# Altium PCB radxa_cm3_io_board_v1360_pcb_layout.PcbDoc (part 5 of 7)
Units mil, origin at the board's own origin, x right, y up, seen from the top; angles counter-clockwise.
Board outline 6299.61 x 3544.09 mil, 4 copper layers (Top, GND, Power, Bottom), stack 35.4 mil thick; 513 components, 397 nets, 1855 pads, 2695 vias.
Unrouted connection lines stored in the file: 280.
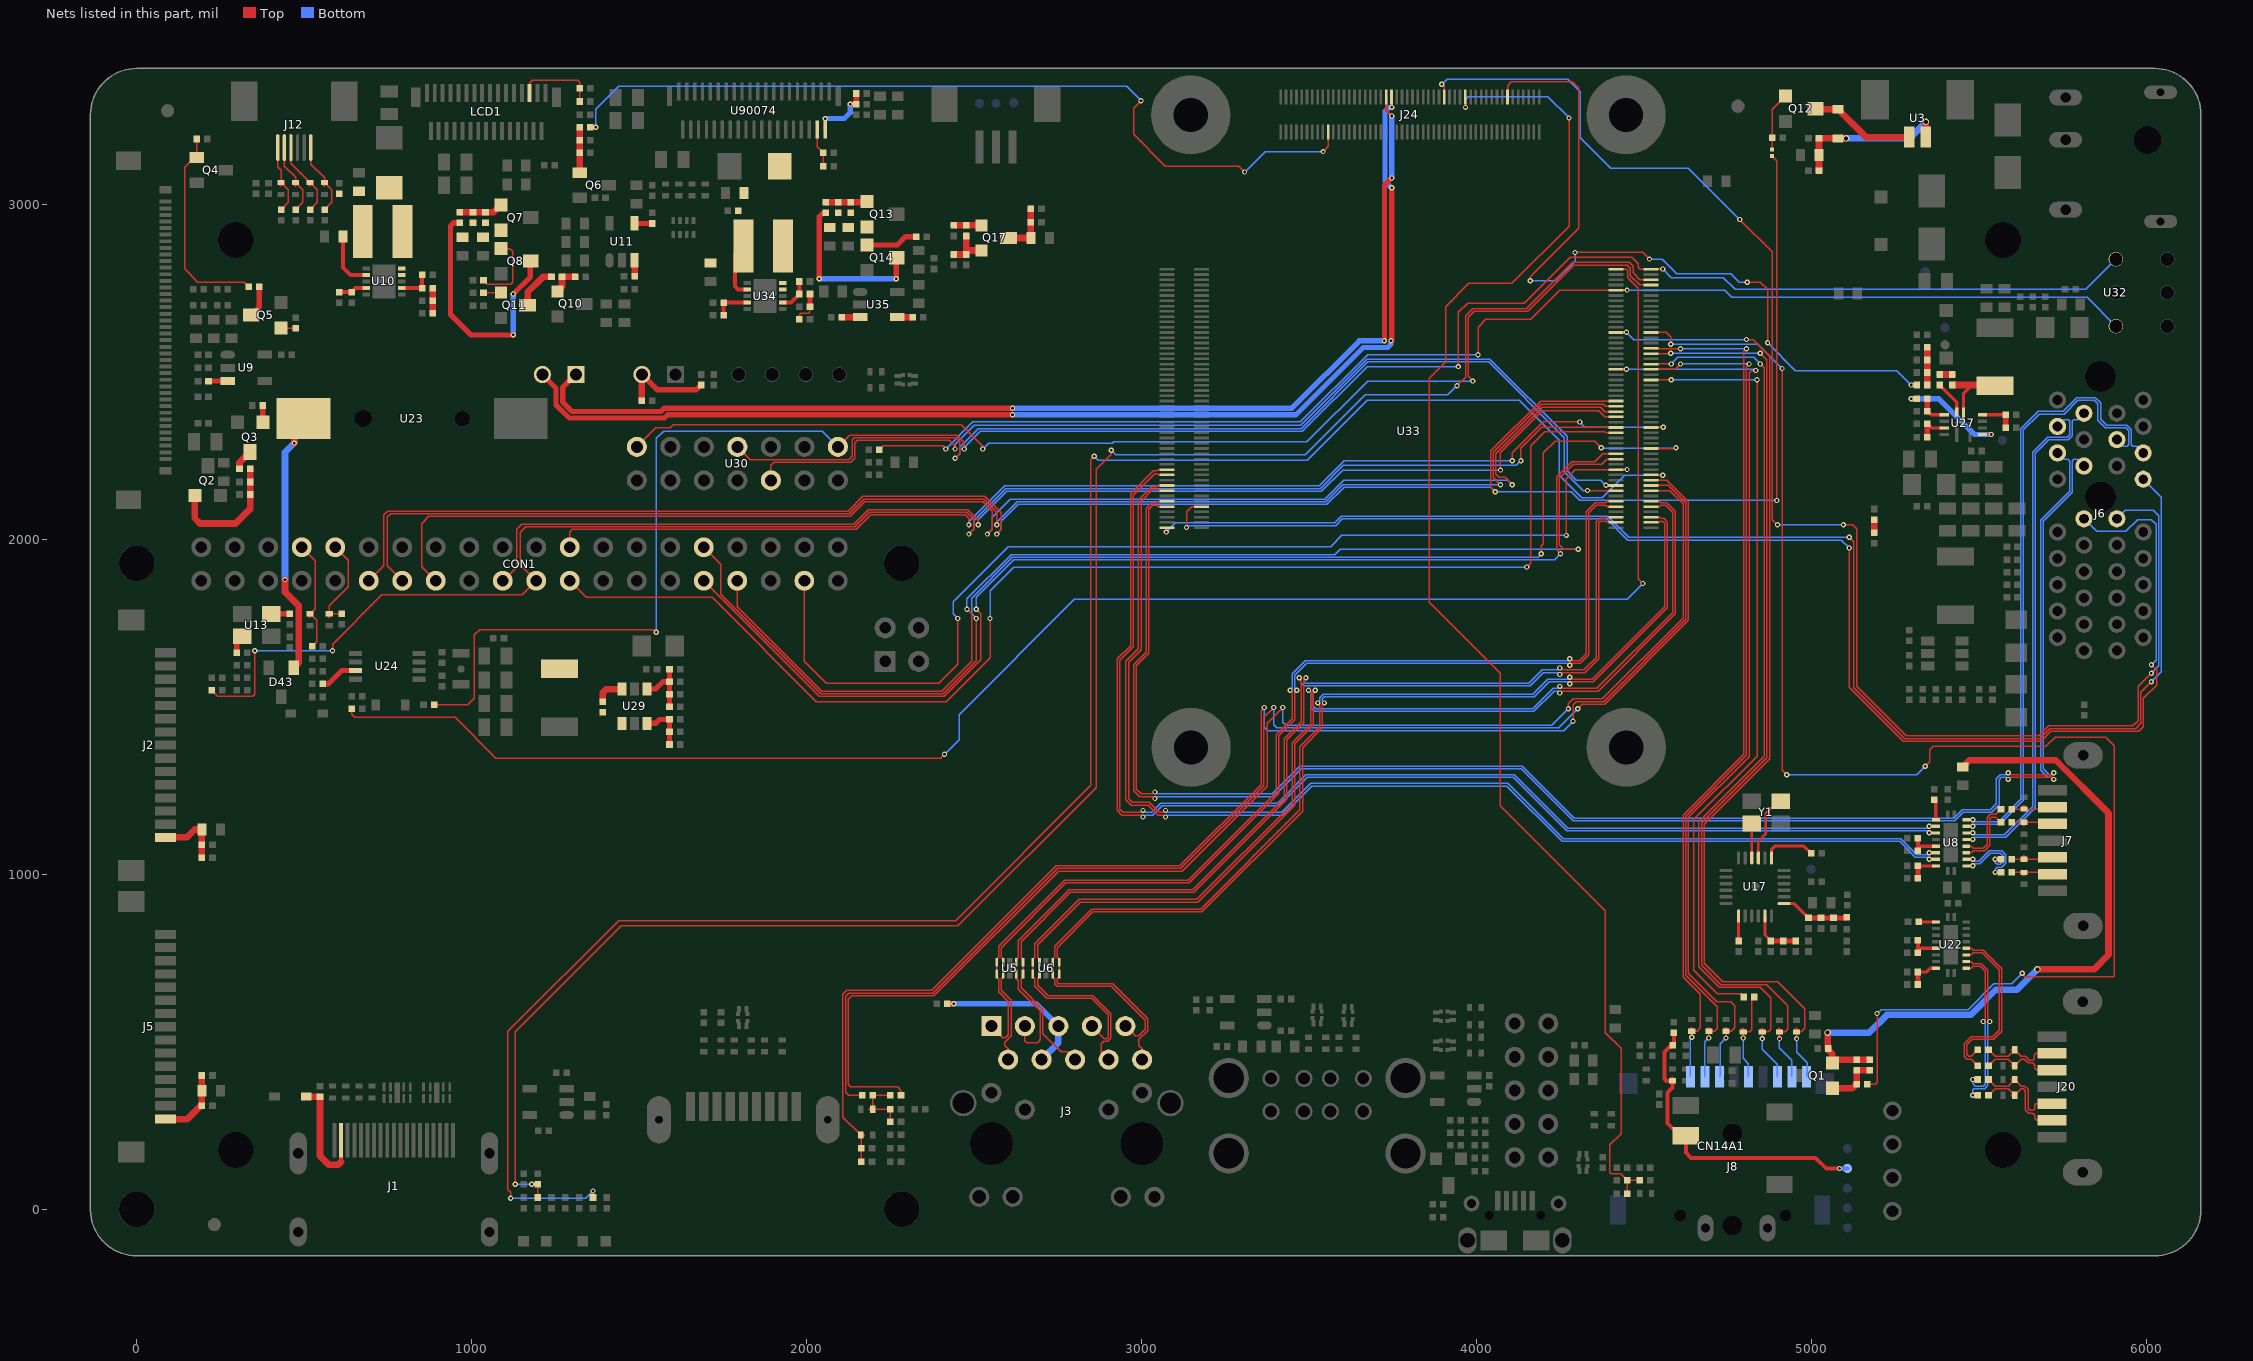
[diagram p7: the nets of this part, all layers, seen from the top]

## Via types
v1: diameter 15.75, hole 7.87, Top to Bottom, 2660 vias
v2: diameter 19.68, hole 11.81, Top to Bottom, 35 vias

## Nets (pads, with @x,y where several pads share a name; then routed paths per layer and width w, separated by ;. In a path a pad name is that pad's centre, name@x,y a point inside that pad or via, vN(x,y) a via of type N, cw(c..) or ccw(c..) an arc to the next point about the centre after c; other vN are vias at no path point) (continued)
N17864453: C2.1 ED16.1 J8.3 R16.1 TP2.1 | length 934.9
  Top w11.81: R16.1@4588.58,527.56 4588.58,490.16 C2.1@4584.65,490.16 4578.74,484.25 4574.8,484.25 4561.02,470.47 4561.02,389.76 4566.93,383.86 ED16.1@4584.65,383.86 4584.65,364.17 4569.69,349.21 4569.69,257.09 4607.09,219.68 J8.3@4624.02,219.68 4624.02,169.29 4639.76,153.54 5011.81,153.54 5043.31,122.05 v1(5082.68,122.05)
  Bottom w11.81: v1(5082.68,122.05) TP2.1@5106.3,122.05
N17865135: C64.1 J10.2 R35.1 | length 280.1
  Top w15.75: J10.2@1508.27,2492.13 1553.54,2446.85 1671.26,2446.85 C64.1@1685.04,2460.63
  Top w19.68: R35.1@1507.87,2413.39 1508.27,2413.78 J10.2@1508.27,2492.13
N17866405: C141.1 R151.1 R153.2 R154.2 | length 112.2
  Top w19.68: R153.2@5344.49,2460.63 R154.2@5344.49,2498.03 C141.1@5344.49,2535.43 R151.1@5344.49,2572.83
N17867136: C153.1 R158.2 R159.2 R160.1 U29.4 | length 188.1
  Top w15.75: U29.4@1523.62,1553.15 1549.21,1553.15 1570.87,1574.8 R160.1@1590.55,1574.8 ; R158.2@1590.55,1500 R159.2@1590.55,1537.4 R160.1@1590.55,1574.8 ; C153.1@1590.55,1612.2 R160.1@1590.55,1574.8
N17867309: Q10.1 R163.1 R164.1 | length 88.1
  Top w19.68: Q10.1@1256.28,2740.26 1269.69,2753.67 R164.1@1269.69,2783.46 R163.1@1309.06,2783.46
N17867352: Q11.1 R165.1 | length 51.6
  Top w3.94: R165.1@1035.43,2736.22 1035.53,2736.32 Q11.1@1086.98,2736.32
N17867429: Q11.3 R164.2 | length 129.1
  Top w19.68: Q11.3@1166.98,2698.82 1166.98,2737.85 1212.6,2783.46 R164.2@1238.19,2783.46
N17923199: C55.1 Q7.2 R62.2 R64.2 R65.1
N17923325: C55.2 Q7.1 R65.2 R68.1 | length 132
  Top w19.68: R68.1@964.57,2976.38 R65.2@1003.94,2976.38 C55.2@1041.34,2976.38 1065.11,2976.38 Q7.1@1087.36,2998.63
N17923337: Q8.3 R68.2 | length 749.9
  Top w15.75: R68.2@964.57,2944.88 946.85,2944.88 937.01,2935.04 937.01,2793.31 937.01,2671.26 998.03,2610.24 v1(1124.02,2610.24) ; v1(1124.02,2732.28) 1175.2,2783.46 1175.2,2829.49 Q8.3@1176.42,2830.71
  Bottom w15.75: v1(1124.02,2610.24) v1(1124.02,2732.28)
N17923349: Q8.1 R69.2 | length 224.7
  Top w3.94: R69.2@1035.43,2773.62 1047.24,2761.81 1116.14,2761.81 1122.05,2767.72 1122.05,2860.24 1114.17,2868.11 1087.96,2868.11 Q8.1@1087.36,2868.71
N17923771: C49.1 C50.1 FB1.2 L2.1 U10.7 | length 170.4
  Top w11.81: C50.1@616.14,2903.54 616.14,2811.02 637.8,2789.37 U10.7@685.04,2789.37
N17923777: D13.1 L2.2 U10.4 U10.5
N17923779: R53.1 R58.2 U10.2 | length 100.8
  Top w11.81: U10.2@790.94,2750 R58.2@852.36,2750 R53.1@852.36,2789.37
N17923781: C53.2 R57.2 R58.1 | length 74.8
  Top w19.68: R57.2@883.86,2675.2 C53.2@883.86,2712.6 R58.1@883.86,2750
N17923789: R52.2 R54.2 U10.9 | length 85.6
  Top w11.81: R54.2@604.33,2738.19 R52.2@641.73,2738.19 653.54,2750 U10.9@685.04,2750
N17923941: LCD1.27 R59.1 R60.1 | length 243.9
  Top w3.94: LCD1.27@1173.23,3332.68 1173.23,3362.2 1181.1,3370.07 1316.93,3370.07 1322.83,3364.17 R60.1@1322.83,3348.43 ; R59.1@1322.83,3307.09 R60.1@1322.83,3348.43 ; R60.1@1322.83,3346.46 R60.1@1322.83,3348.43
N17925583: R70.2 U11.3 | length 47.2
  Top w19.68: R70.2@1486.22,2785.43 U11.3@1486.22,2832.68
N17925595: C63.1 U11.4 | length 53.1
  Top w15.75: U11.4@1486.22,2942.91 C63.1@1539.37,2942.91
N17929067: C165.1 Q13.2 R197.2 R198.2 R200.1
N17929077: R194.2 R195.1 U90074.4 | length 116.6
  Top w3.94: U90074.4@2031.5,3223.43 2031.5,3171.26 R194.2@2049.21,3153.54 R195.1@2049.21,3114.17
N17929082: C165.2 Q13.1 R200.2 R203.1 | length 123.9
  Top w19.68: R203.1@2057.09,3005.91 C165.2@2094.49,3005.91 R200.2@2131.89,3005.91 2177.31,3005.91 Q13.1@2179.88,3008.47
N17929088: Q14.3 R203.2 | length 503.4
  Top w15.75: v1(2037.4,2777.56) 2037.4,2962.6 2049.21,2974.41 R203.2@2057.09,2974.41 ; v1(2267.72,2777.56) 2267.72,2839.33 Q14.3@2268.94,2840.55
  Bottom w15.75: v1(2037.4,2777.56) v1(2267.72,2777.56)
N17929094: Q14.1 R204.2 | length 157.2
  Top w15.75: Q14.1@2179.88,2878.55 2270.28,2878.55 2295.28,2903.54 R204.2@2326.77,2903.54
N17929106: C159.1 C160.1 FB5.2 L14.1 U34.7 | length 172.2
  Top w11.81: L14.1@1811.02,2875.98 1785.43,2850.4 1785.43,2755.91 1795.28,2746.06 U34.7@1822.83,2746.06
N17929109: D50.1 L14.2 U34.4 U34.5
N17929110: R188.1 R190.2 U34.2 | length 97.6
  Top w11.81: U34.2@1928.74,2706.69 1952.76,2706.69 R190.2@1978.35,2732.28 R188.1@1978.35,2769.68
N17929111: C164.2 R190.1 R193.2 | length 100.5
  Top w3.94: R193.2@1978.35,2657.48 1978.35,2669.29 1984.25,2675.2 2005.91,2675.2 2009.84,2679.13 C164.2@2009.84,2694.88
  Top w15.75: C164.2@2009.84,2694.88 R190.1@2009.84,2732.28
N17929115: R187.2 R191.2 U34.9 | length 108.3
  Top w11.81: R191.2@1751.97,2669.29 R187.2@1751.97,2706.69 U34.9@1822.83,2706.69
N17929193: R205.2 U35.3 | length 55.1
  Top w19.68: R205.2@2104.33,2663.39 U35.3@2159.45,2663.39
N17929199: C173.1 U35.4 | length 47.2
  Top w19.68: U35.4@2269.68,2663.39 C173.1@2316.93,2663.39
N17943889: R87.1 U13.3 | length 55.7
  Top w15.75: R87.1@299.21,1661.42 299.21,1694.89 U13.3@314.96,1710.63
N17943950: R85.1 U13.1 | length 55.1
  Top w15.75: U13.1@401.58,1777.56 R85.1@456.69,1777.56
N17972145: R133.1 R135.1 U22.8 | length 95.7
  Top w9.84: R133.1@5316.93,708.66 5342.52,708.66 5353.94,720.08 U22.8@5370.47,720.08
  Top w15.75: R135.1@5316.93,671.26 R133.1@5316.93,708.66
N17973086: C110.2 D41.2 J20.2 | length 234.6
  Top w3.94: C110.2@5527.56,476.38 5547.24,456.69 5586.61,456.69 D41.2@5606.3,476.38 5625.98,456.69 5637.8,456.69 5649.61,444.88 5659.45,444.88 5663.39,448.82 5663.39,459.84 5669.29,465.75 J20.2@5717.72,465.75
N17973089: C112.2 D40.2 J20.3 | length 233.9
  Top w3.94: C112.2@5527.56,429.13 5547.24,448.82 5586.61,448.82 D40.2@5606.3,429.13 5625.98,448.82 5633.86,448.82 5645.67,437.01 5659.45,437.01 5665.75,430.71 5665.75,421.26 5671.26,415.75 J20.3@5717.72,415.75
N17973092: C113.2 D39.2 J20.5 | length 294.1
  Top w3.94: C113.2@5527.56,387.8 5547.24,368.11 5586.61,368.11 D39.2@5606.3,387.8 5625.98,368.11 5635.83,368.11 5645.67,358.27 5645.67,301.18 5651.57,295.28 5661.42,295.28 5665.35,299.21 5665.35,311.81 5669.29,315.75 J20.5@5717.72,315.75
N17973095: C114.2 D38.2 J20.6 | length 293
  Top w3.94: C114.2@5527.56,340.55 5547.24,360.24 5586.61,360.24 D38.2@5606.3,340.55 5625.98,360.24 5631.89,360.24 5637.8,354.33 5637.8,297.24 5647.64,287.4 5659.45,287.4 5665.35,281.5 5665.35,271.65 5671.26,265.75 J20.6@5717.72,265.75
N17975409: R132.2 U22.1 | length 51.7
  Top w9.84: R132.2@5318.9,858.27 5319.29,857.87 U22.1@5370.47,857.87
N17977866: R25.2 U8.1 | length 61.2
  Top w9.84: R25.2@5366.14,1222.44 5370.47,1218.11 U8.1@5370.47,1162.99
N17978284: C31.2 D8.2 J7.2 | length 126.9
  Top w3.94: C31.2@5596.46,1194.88 D8.2@5633.86,1194.88 5702.76,1194.88 5710.63,1202.76 5717.32,1202.76 J7.2@5719.29,1200.79
N17978286: C32.2 D7.2 J7.3 | length 124.8
  Top w3.94: C32.2@5596.46,1155.51 D7.2@5633.86,1155.51 5714.57,1155.51 J7.3@5719.29,1150.79
N17978288: C33.2 D6.2 J7.5 | length 125.1
  Top w3.94: C33.2@5596.46,1045.28 D6.2@5633.86,1045.28 5713.78,1045.28 J7.5@5719.29,1050.79
N17978290: C34.2 D5.2 J7.6 | length 125
  Top w3.94: C34.2@5596.46,1005.91 D5.2@5633.86,1005.91 5714.17,1005.91 J7.6@5719.29,1000.79
N18034361: R206.2 R207.2 U8.5 | length 90.9
  Top w9.84: 5316.93,1084.25 U8.5@5370.47,1084.25
  Top w11.81: R206.2@5316.93,1070.87 5316.93,1084.25 R207.2@5316.93,1108.27
N18035208: R208.2 R209.2 U22.5 | length 93.4
  Top w9.84: R209.2@5316.93,773.23 5322.83,779.13 U22.5@5370.47,779.13
  Top w11.81: R209.2@5316.93,765.75 5316.93,773.23 R208.2@5316.93,803.15
N18058072: D11.2 J12.4 R46.2 | length 226.6
  Top w3.94: J12.4@460.63,3169.29 460.63,3122.05 D11.2@517.72,3064.96 539.37,3043.31 539.37,3005.91 R46.2@517.72,2984.25
N18058646: D10.2 J12.5 R48.2 | length 216.8
  Top w3.94: J12.5@440.94,3169.29 440.94,3114.17 474.41,3080.71 D10.2@474.41,3064.96 496.06,3043.31 496.06,3005.91 R48.2@474.41,2984.25
N18110264: C6.1 Q1.2 R12.1 R220.1 R9212.1 | length 2123.7
  Top w3.94: C6.1@5131.89,446.85 5131.89,448.82 C6.1@5133.86,446.85
  Top w19.68: v2(5047.24,527.56) 5047.24,480.31 R220.1@5051.18,476.38 ; R220.1@5049.21,480.31 5049.21,478.35 R220.1@5051.18,476.38 ; Q1.2@5062.25,437.61 5061.02,438.83 Q1.2@5061.02,446.85 ; R12.1@5173.23,446.85 5131.89,446.85 5151.57,446.85 C6.1@5133.86,446.85 Q1.2@5061.02,446.85 ; R9212.1@5450.79,1320.87 5470.47,1340.55 5728.35,1340.55 5885.83,1183.07 5885.83,759.84 5842.52,716.54 v2(5673.23,716.54) ; R220.1@5051.18,476.38 5051.18,474.41 5061.02,464.57 Q1.2@5061.02,446.85
  Bottom w19.68: v2(5047.24,527.56) 5171.26,527.56 5224.41,580.71 5474.41,580.71 5549.21,655.51 5612.2,655.51 v2(5673.23,716.54)
N18119522: Q17.2 R221.2 R223.2 R9209.1 | length 138.2
  Top w19.68: R9209.1@2438.98,2850.39 R223.2@2476.38,2850.39 2476.38,2862.11 ; R221.2@2476.38,2905.51 2476.38,2862.11 ; Q17.2@2522.02,2862.11 2476.38,2862.11
N18119524: C176.1 Q17.1 R221.1 | length 83.1
  Top w19.68: C176.1@2438.98,2937.01 R221.1@2476.38,2937.01 2521.93,2937.01 Q17.1@2522.02,2937.11
N18119530: C174.1 C175.1 Q17.3 R222.1 | length 153.9
  Top w19.68: Q17.3@2602.02,2899.61 C174.1@2669.29,2899.61 C175.1@2669.29,2946.85 R222.1@2669.29,2986.22
N18131469: R9210.2 R9211.2 U90074.2 | length 189.4
  Top w9.84: U90074.2@2055.12,3223.43 v1(2055.12,3255.91)
  Top w15.75: v1(2129.92,3299.21) R9211.2@2147.64,3299.21 R9210.2@2147.64,3330.71
  Bottom w15.75: v1(2055.12,3255.91) 2112.2,3255.91 2129.92,3273.62 v1(2129.92,3299.21)
N18132213: Q6.1 R63.1 R66.2 R67.2 | length 135.8
  Top w19.68: Q6.1@1322.83,3094.49 R67.2@1322.83,3153.54 R63.1@1322.83,3190.94 R66.2@1322.83,3230.31
N18282621: C3.2 J3.4 J3.5 | length 480.3
  Top w15.75: C3.2@2419.29,614.17 v1(2438.98,614.17)
  Bottom w15.75: v1(2438.98,614.17) 2684.25,614.17 J3.5@2751.18,547.24
  Bottom w19.68: J3.4@2701.18,447.24 2751.18,497.24 J3.5@2751.18,547.24
N18372552: C16.1 C17.1 FB6.2 J2.1 | length 202.7
  Top w19.68: J2.1@86.61,1110.25 149.61,1110.25 173.22,1133.86 C16.1@194.88,1133.86 C17.1@194.88,1088.58 FB6.2@194.88,1049.21
N18373067: C18.1 C23.1 FB7.2 J5.1 | length 215.1
  Top w19.68: J5.1@86.61,269.7 151.57,269.7 190.93,309.06 C23.1@194.88,309.06 C18.1@194.88,354.33 FB7.2@194.88,399.61
N18385878: C24.2 R27.2 | length 39.4
  Top w19.68: R27.2@5187.01,2019.68 C24.2@5187.01,2059.06
N18388278: D28.1 Q12.3 U3.1 | length 315.3
  Top w19.68: Q12.3@5011.07,3285.43 5012.44,3284.06 D28.1@5078.74,3284.06 5162.01,3200.79 U3.1@5291.34,3200.79
N18388291: Q12.1 R71.2 R72.1 | length 176.7
  Top w3.94: R71.2@4881.89,3163.39 R72.1@4881.89,3198.82 4881.89,3283.32 Q12.1@4922.01,3323.43
N18388334: C25.2 C26.2 D28.2 R29.2 U3.2 | length 483.5
  Top w3.94: C25.2@5021.65,3145.67 C25.2@5021.65,3147.64
  Top w19.68: R29.2@5021.65,3100.39 5021.65,3145.67 C26.2@5021.65,3196.85 5078.15,3196.85 D28.2@5078.74,3196.26 5079.33,3196.85 v2(5102.36,3196.85) ; U3.2@5340.55,3200.79 v2(5340.55,3246.06)
  Bottom w19.68: v2(5102.36,3196.85) 5291.34,3196.85 v2(5340.55,3246.06)
N18881950: R42.1 U9.3 | length 57.1
  Top w15.75: R42.1@214.57,2472.44 U9.3@271.65,2472.44
N18912482: CON1.8 D49.2 R167.1 | length 332.5
  Top w3.94: CON1.8@492.91,1976.38 533.46,1935.83 533.46,1793.31 D49.2@517.72,1777.56 537.4,1757.87 537.4,1755.91 537.4,1694.88 R167.1@523.62,1681.1
N18912484: CON1.10 D48.2 R168.1 | length 276
  Top w3.94: CON1.10@592.91,1976.38 631.89,1937.4 631.89,1905.51 631.89,1858.27 574.8,1801.18 D48.2@574.8,1777.56 R168.1@612.2,1777.56
N19132698: C1.1 D1.2 J1.18 | length 360.3
  Top w11.81: 610.24,141.73 J1.18@610.24,206.69
  Top w19.68: D1.2@505.91,336.61 C1.1@547.24,336.61 547.24,159.45 572.83,133.86 602.36,133.86 610.24,141.73
N19323396: C143.1 R155.2 U27.6 | length 108.3
  Top w9.84: U27.6@5509.85,2372.05 C143.1@5578.74,2372.05
  Top w15.75: R155.2@5578.74,2332.68 C143.1@5578.74,2372.05
N19323402: C144.1 R156.2 U27.9 | length 92.7
  Top w9.84: C144.1@5344.49,2381.89 5346.46,2381.89 5356.3,2372.05 U27.9@5395.67,2372.05
  Top w15.75: C144.1@5344.49,2381.89 R156.2@5344.49,2419.29
N19323495: C129.2 L12.1 U27.7 | length 303.9
  Top w9.84: U27.7@5452.76,2364.17 5452.76,2435.04 5476.38,2458.66 L12.1@5547.24,2458.66
  Top w19.68: C129.2@5419.29,2460.63 5545.28,2460.63 L12.1@5547.24,2458.66
N19323501: R149.1 R152.2 U27.11 | length 95.4
  Top w9.84: R152.2@5344.49,2344.49 5356.3,2332.68 U27.11@5395.67,2332.68
  Top w15.75: R149.1@5344.49,2305.12 R152.2@5344.49,2344.49
N19323523: R147.1 U27.8 | length 101.9
  Top w9.84: R147.1@5381.89,2460.63 5433.07,2409.45 U27.8@5433.07,2379.92
N19323525: C129.1 R147.2 | length 37.4
  Top w19.68: R147.2@5381.89,2492.13 C129.1@5419.29,2492.13
N19323570: R156.1 U27.3 | length 323.6
  Top w9.84: U27.3@5509.85,2312.99 v1(5535.43,2312.99)
  Top w15.75: v1(5297.24,2419.29) R156.1@5312.99,2419.29
  Bottom w15.75: v1(5297.24,2419.29) 5379.92,2419.29 5486.22,2312.99 v1(5535.43,2312.99)
N19395058: C89.1 R94.2 R97.2 U17.17 | length 158.9
  Top w3.94: C89.1@4915.35,801.18 C89.1@4917.32,801.18
  Top w7.87: U17.17@4860.24,875.98 4860.24,818.9 R94.2@4877.95,801.18
  Top w15.75: R94.2@4877.95,801.18 4917.32,801.18 R97.2@4952.76,801.18
N19395105: R102.1 U17.13 | length 74.8
  Top w7.87: R102.1@4781.5,801.18 U17.13@4781.5,875.98
N19395221: U17.3 Y1.1 | length 201.6
  Top w7.87: U17.3@4840.55,1049.21 4840.55,1098.43 4862.2,1120.08 4862.2,1181.1 4895.67,1214.57 4903.55,1214.57 Y1.1@4907.48,1218.5
N19395225: U17.4 Y1.3 | length 102.4
  Top w7.87: U17.4@4820.87,1049.21 Y1.3@4820.86,1151.58
N19395584: C84.1 C87.1 C88.1 L4.2 U17.19 | length 205.8
  Top w9.84: U17.19@4917.32,913.39 4946.85,913.39 C87.1@4990.16,870.08
  Top w15.75: C87.1@4990.16,870.08 C88.1@5027.56,870.08 C84.1@5064.96,870.08 5102.36,870.08 L4.2@5104.33,872.05
N19614789: D4.2 R5.2 R6.2 R8.2 R9.1 | length 185
  Top w3.94: R9.1@2250,261.81 R8.2@2250,299.21 D4.2@2196.85,299.21 R6.2@2196.85,340.55 R5.2@2250,340.55
N19638712: C145.2 L13.1 U29.6 | length 88.7
  Top w19.68: C145.2@1391.73,1515.75 1391.73,1543.31 1401.57,1553.15 U29.6@1448.82,1553.15
N19638714: C145.1 U29.1
N19638732: C148.2 R157.2 R161.1 U29.3 | length 146.6
  Top w15.75: U29.3@1523.62,1450.79 1549.21,1450.79 1561.02,1462.6 R161.1@1590.55,1462.6 C148.2@1590.55,1425.2 R157.2@1590.55,1387.8
N19658373: CN14A1.5 ED12.1 R11.2 | length 269.9
  Top w3.94: v1(4795.28,511.81) 4795.28,530.12 4814.96,530.12 4820.87,536.02 4820.87,625.98 R11.2@4828.74,633.86
  Bottom w3.94: v1(4795.28,511.81) 4795.28,450.79 4811.02,435.04 CN14A1.5@4811.02,395.89
N19659610: C6.2 Q1.1 R12.2 R13.1 | length 157.5
  Top w19.68: Q1.1@5062.25,361.61 5121.45,361.61 R13.1@5133.86,374.02 C6.2@5133.86,415.35 R12.2@5173.23,415.35
N19662232: C38.2 Q2.1 R37.2 R39.1 | length 380.1
  Top w3.94: R37.2@338.58,2169.29 R37.2@338.58,2171.26
  Top w19.68: Q2.1@174.6,2130.67 173.23,2129.3 173.23,2062.99 188.98,2047.24 295.28,2047.24 338.58,2090.55 C38.2@338.58,2133.86 338.58,2169.29 R39.1@338.58,2210.63
N19662254: Q3.3 R39.2 | length 63
  Top w19.68: R39.2@307.09,2210.63 307.09,2229.09 Q3.3@338.58,2260.59
N19662390: Q3.1 R41.2 | length 50.2
  Top w15.75: R41.2@375.98,2399.61 376.58,2399.01 Q3.1@376.58,2349.65
N19675077: D12.2 J12.1 R45.2 | length 220.1
  Top w3.94: J12.1@519.69,3169.29 519.69,3120.08 561.02,3078.74 D12.2@561.02,3064.96 582.68,3043.31 582.68,3005.91 R45.2@561.02,2984.25
N19675113: D9.2 J12.6 R49.2 | length 207.1
  Top w3.94: J12.6@421.26,3169.29 421.26,3112.2 431.1,3102.36 D9.2@431.1,3064.96 452.76,3043.31 452.76,3005.91 R49.2@431.1,2984.25
N19676994: Q4.1 R47.1 R50.2 | length 618.9
  Top w3.94: R47.1@179.13,3194.88 Q4.1@179.13,3139.76 173.23,3139.76 143.7,3110.24 143.7,2807.09 183.07,2767.72 320.87,2767.72 R50.2@334.65,2753.94
N178561170: Q5.1 R51.1 | length 45.4
  Top w3.94: Q5.1@430.36,2631.29 430.36,2629.92 R51.1@474.41,2629.92
N178564242: Q5.3 R50.1 | length 94.9
  Top w15.75: Q5.3@341.3,2669.29 366.14,2694.14 R50.1@366.14,2753.94
NPWR_LED: R178.1 R179.2 U33.95 | length 5618.5
  Top w3.94: v1(1129.92,74.8) 1129.92,530.62 1445.76,846.46 2451.46,846.46 2864.17,1259.17 2864.17,2208.6 2909.45,2253.87 v1(2909.45,2265.75) ; v1(1179.13,74.8) R179.2@1196.85,74.8 R178.1@1196.85,35.43 ; v1(3940.94,2458.66) 3966.54,2484.25 3966.54,2667.32 3988.19,2688.98 4148.31,2688.98 4286.11,2826.77 4454.72,2826.77 4466.54,2814.96 4466.54,2795.28 4486.81,2775 U33.95@4520.47,2775
  Bottom w3.94: v1(1129.92,74.8) v1(1179.13,74.8) ; v1(2909.45,2265.75) 2923.23,2251.97 3487.57,2251.97 3666.7,2431.1 3913.39,2431.1 v1(3940.94,2458.66)
OVCJ: R96.2 U17.1 | length 156.7
  Top w9.84: U17.1@4879.92,1049.21 4879.92,1074.8 4889.76,1084.65 4976.38,1084.65 R96.2@4998.03,1062.99
PCIE20_CLKREQN_M2: J6.B12 U33.102 | length 4268.7
  Top w3.94: v1(3072.83,2021.65) 3074.61,2021.65 U33.102@3075.2,2034.84 ; v1(5112.2,2005.91) 5125.98,1992.13 5125.98,1557.09 5277.56,1405.51 5681.16,1405.51 5710.69,1435.04 5966.54,1435.04 5982.28,1450.79 5982.28,1543.31 v1(6013.78,1574.8)
  Bottom w3.94: v1(3072.83,2021.65) 3100.39,2049.21 3575.48,2049.21 3595.16,2068.9 4391.06,2068.9 4454.05,2005.91 v1(5112.2,2005.91) ; J6.B12@5989.37,2179.53 6043.31,2125.59 6043.31,1604.33 v1(6013.78,1574.8)
PCIE20_REFCLKN: J6.A14 U33.112 | length 4946.3
  Top w3.94: v1(3039.37,1226.38) 3033.46,1232.28 2994.09,1232.28 2976.38,1250 2976.38,1625.98 3013.78,1663.39 3013.78,2093.56 3029.87,2109.65 3045.28,2109.65 3049.21,2113.58 U33.112@3075.2,2113.58 ; v1(5586.61,1283.46) 5592.52,1289.37 5716.54,1289.37 v1(5722.44,1283.46)
  Bottom w3.94: v1(3039.37,1226.38) 3045.28,1232.28 3340.21,1232.28 3393.03,1232.28 3475.7,1314.96 4132.57,1314.96 4288.08,1159.45 5426.49,1159.45 5452.08,1185.04 5536.73,1185.04 5559.05,1207.37 5559.05,1282.17 5566.25,1289.37 5580.71,1289.37 v1(5586.61,1283.46) ; v1(5722.44,1283.46) 5716.54,1289.37 5705.06,1289.37 5683.07,1311.36 5683.07,2057.09 5769.69,2143.7 5769.69,2233.86 5764.76,2238.78 5752.95,2238.78 J6.A14@5733.46,2258.27
PCIE20_REFCLKP: J6.A13 U33.110 | length 4905
  Top w3.94: v1(3039.37,1246.06) 3033.46,1240.16 2998.03,1240.16 2984.25,1253.94 2984.25,1285.43 2984.25,1622.05 3021.65,1659.45 3021.65,2090.3 3033.13,2101.77 3045.28,2101.77 3049.21,2097.83 U33.110@3075.2,2097.83 ; v1(5586.61,1303.15) 5592.52,1297.24 5716.54,1297.24 v1(5722.44,1303.15)
  Bottom w3.94: v1(3039.37,1246.06) 3045.28,1240.16 3389.76,1240.16 3472.44,1322.83 4135.83,1322.83 4291.34,1167.32 5423.23,1167.32 5448.82,1192.91 5533.46,1192.91 5551.18,1210.63 5551.18,1285.43 5562.99,1297.24 5580.71,1297.24 v1(5586.61,1303.15) ; v1(5722.44,1303.15) 5716.54,1297.24 5708.32,1297.24 5690.94,1314.62 5690.94,2053.83 5777.56,2140.44 5777.56,2233.86 5782.09,2238.38 5792.72,2238.38 J6.A13@5812.2,2218.9
PCIE20_RXN: U8.7 U33.118 | length 3581.3
  Top w3.94: v1(3070.87,1171.26) 3064.96,1177.17 3049.21,1177.17 3019.69,1206.69 2968.5,1206.69 2952.76,1222.44 2952.76,1635.83 2990.16,1673.23 2990.16,2117.18 3029.87,2156.89 3045.28,2156.89 3049.21,2160.83 U33.118@3075.2,2160.83 ; v1(5350.39,1045.28) 5370.08,1045.28 U8.7@5370.47,1044.88
  Bottom w3.94: v1(3070.87,1171.26) 3076.77,1177.17 3407.48,1177.17 3420.58,1177.17 3507.2,1263.78 4089.26,1263.78 4254.61,1098.43 5262.15,1098.43 5309.39,1051.18 5344.49,1051.18 v1(5350.39,1045.28)
PCIE20_RXN_1: J6.A17 U8.15 | length 1522.6
  Top w3.94: U8.15@5461.02,1103.94 5461.42,1104.33 v1(5480.31,1104.33)
  Bottom w3.94: v1(5480.31,1104.33) 5486.22,1110.24 5578.4,1110.24 5667.32,1199.16 5667.32,2256.58 5707.99,2297.24 5765.41,2297.24 5777.56,2309.39 5777.56,2351.97 5782.48,2356.89 5792.72,2356.89 J6.A17@5812.2,2376.38
PCIE20_RXP: U8.6 U33.116 | length 3554.8
  Top w3.94: v1(3070.87,1190.94) 3064.96,1185.04 3052.47,1185.04 3022.95,1214.57 2972.44,1214.57 2960.63,1226.38 2960.63,1632.56 2998.03,1669.97 2998.03,2113.92 3033.13,2149.02 3045.28,2149.02 3049.21,2145.08 U33.116@3075.2,2145.08 ; v1(5350.39,1064.96) 5370.08,1064.96 U8.6@5370.47,1064.57
  Bottom w3.94: v1(3070.87,1190.94) 3076.77,1185.04 3417.32,1185.04 3503.94,1271.65 4092.52,1271.65 4257.87,1106.3 5265.41,1106.3 5312.65,1059.05 5344.49,1059.05 v1(5350.39,1064.96)
PCIE20_RXP_1: J6.A16 U8.16 | length 1511
  Top w3.94: U8.16@5461.02,1123.62 5461.42,1124.02 v1(5480.31,1124.02)
  Bottom w3.94: v1(5480.31,1124.02) 5486.22,1118.11 5575.14,1118.11 5659.45,1202.42 5659.45,2259.84 5704.72,2305.12 5762.15,2305.12 5769.69,2312.65 5769.69,2351.97 5765.16,2356.49 5752.95,2356.49 J6.A16@5733.46,2337.01
PCIE20_TXN: U8.3 U33.124 | length 3668.8
  Top w3.94: v1(3003.94,1171.26) 2998.03,1177.17 2940.94,1177.17 2927.17,1190.94 2927.17,1643.7 2966.54,1683.07 2966.54,2135.83 3034.84,2204.13 3045.28,2204.13 3049.21,2208.07 U33.124@3075.2,2208.07 ; v1(5350.39,1124.02) 5370.08,1124.02 U8.3@5370.47,1123.62
  Bottom w3.94: v1(3003.94,1171.26) 3009.84,1177.17 3033.46,1177.17 3061.02,1204.72 3408.77,1204.72 3493.42,1289.37 4108.94,1289.37 4268.39,1129.92 5344.49,1129.92 v1(5350.39,1124.02)
PCIE20_TXN_1: J6.B15 U8.17 | length 1813.8
  Top w3.94: U8.17@5461.02,1143.31 5461.42,1143.7 v1(5480.31,1143.7)
  Bottom w3.94: v1(5480.31,1143.7) 5486.22,1149.61 5560.69,1149.61 5631.89,1220.81 5631.89,2327.11 5678.8,2374.02 5753.26,2374.02 5794.6,2415.35 5843.2,2415.35 5854.33,2404.22 5854.33,2355.01 5876.66,2332.68 5937.35,2332.68 5946.06,2323.96 5946.06,2281.89 5942.32,2278.15 5930.12,2278.15 J6.B15@5910.63,2297.64
PCIE20_TXP: U8.2 U33.122 | length 3641.9
  Top w3.94: v1(3003.94,1190.94) 2998.03,1185.04 2944.88,1185.04 2935.04,1194.88 2935.04,1639.76 2974.41,1679.13 2974.41,2131.89 3038.78,2196.26 3045.28,2196.26 3049.21,2192.32 U33.122@3075.2,2192.32 ; v1(5350.39,1143.7) 5370.08,1143.7 U8.2@5370.47,1143.31
  Bottom w3.94: v1(3003.94,1190.94) 3009.84,1185.04 3029.53,1185.04 3057.09,1212.6 3405.51,1212.6 3490.16,1297.24 4112.2,1297.24 4271.65,1137.8 5344.49,1137.8 v1(5350.39,1143.7)
PCIE20_TXP_1: J6.B14 U8.18 | length 1827
  Top w3.94: U8.18@5461.02,1162.99 5461.42,1163.39 v1(5480.31,1163.39)
  Bottom w3.94: v1(5480.31,1163.39) 5486.22,1157.48 5557.42,1157.48 5624.02,1224.07 5624.02,2330.37 5675.53,2381.89 5750,2381.89 5791.34,2423.23 5846.46,2423.23 5862.2,2407.48 5862.2,2358.27 5879.92,2340.55 5940.61,2340.55 5953.94,2327.22 5953.94,2281.89 5958.07,2277.75 5969.88,2277.75 J6.B14@5989.37,2258.27
PCIE20_WAKEN: J6.B11 J24.38 | length 4561.1
  Top w3.94: v1(3895.67,3358.27) 3902.95,3350.98 J24.38@3902.95,3320.08 ; v1(4785.43,2954.72) 4881.89,2858.27 4881.89,2059.06 v1(4897.64,2043.31) ; v1(5094.49,2043.31) 5122.05,2043.31 5133.86,2031.5 5133.86,1561.02 5281.5,1413.39 5677.9,1413.39 5707.43,1442.91 5958.66,1442.91 5974.41,1458.66 5974.41,1561.02 v1(6013.78,1600.39)
  Bottom w3.94: v1(3895.67,3358.27) 3911.42,3374.02 4271.65,3374.02 4309.06,3336.61 4309.06,3198.82 4399.61,3108.27 4631.89,3108.27 v1(4785.43,2954.72) ; v1(4897.64,2043.31) v1(5094.49,2043.31) ; J6.B11@5910.63,2061.42 5935.83,2086.61 6019.69,2086.61 6035.43,2070.87 6035.43,1622.05 v1(6013.78,1600.39)
PCIE_EN_L: R26.1 R28.1 U8.8 | length 91.1
  Top w9.84: R26.1@5316.93,1025.59 5317.32,1025.2 U8.8@5370.47,1025.2
  Top w15.75: R28.1@5316.93,988.19 R26.1@5316.93,1025.59
PCIE_NRST: J6.A11 U33.109 | length 4385.6
  Top w3.94: v1(3133.86,2035.43) 3133.86,2082.09 3149.61,2097.83 U33.109@3179.13,2097.83 ; v1(5112.2,1974.41) 5112.2,1559.06 5273.62,1397.64 5684.42,1397.64 5713.95,1427.17 5976.38,1427.17 5990.16,1440.94 5990.16,1525.59 6029.53,1564.96 6029.53,1610.24 v1(6013.78,1625.98)
  Bottom w3.94: v1(3133.86,2035.43) 3139.76,2041.34 3578.74,2041.34 3598.43,2061.02 4387.8,2061.02 4450.79,1998.03 5088.58,1998.03 v1(5112.2,1974.41) ; J6.A11@5812.2,2061.42 5850,2023.62 5937.01,2023.62 5972.44,2059.06 6013.78,2059.06 6027.56,2045.28 6027.56,1639.76 v1(6013.78,1625.98)
PHY1_LED0_Y1: R6.1 U33.19 | length 4011.6
  Top w3.94: R6.1@2165.35,340.55 2125.98,340.55 2116.14,350.39 2116.14,635.83 2125.98,645.67 2376.66,645.67 2748.71,1017.72 3117.24,1017.72 3364.17,1264.65 3364.17,1468.5 v1(3393.7,1498.03) ; v1(4301.18,1494.09) 4314.96,1507.87 4381.89,1507.87 4631.89,1757.87 4631.89,2112.2 4567.52,2176.57 U33.19@4520.47,2176.57
  Bottom w3.94: v1(3393.7,1498.03) 3393.7,1446.85 3403.54,1437.01 4244.09,1437.01 v1(4301.18,1494.09)
PHY1_LED1_G: D3.2 R2.2 R3.1 U33.17 | length 4224.6
  Top w3.94: R2.2@2163.39,141.73 R3.1@2163.39,183.07 2163.39,220.47 D3.2@2161.42,222.44 2108.27,275.59 2108.27,641.73 2120.08,653.54 2373.4,653.54 2745.45,1025.59 3113.98,1025.59 3356.3,1267.91 3356.3,1488.19 v1(3366.14,1498.03) ; v1(4287.4,1456.69) 4287.4,1505.91 4297.24,1515.75 4378.63,1515.75 4624.02,1761.14 4624.02,2108.94 4572.13,2160.83 U33.17@4520.47,2160.83
  Bottom w3.94: v1(3366.14,1498.03) 3366.14,1438.98 3375.98,1429.13 4259.84,1429.13 v1(4287.4,1456.69)
PHY1_LED2_Y: R5.1 U33.15 | length 4039
  Top w3.94: R5.1@2281.5,340.55 2281.5,356.3 2271.65,366.14 2131.89,366.14 2124.02,374.02 2124.02,627.95 2133.86,637.8 2379.92,637.8 2751.97,1009.84 3120.5,1009.84 3374.02,1263.36 3374.02,1450.79 v1(3421.26,1498.03) ; v1(4273.62,1494.09) 4273.62,1509.84 4287.4,1523.62 4375.37,1523.62 4616.14,1764.4 4616.14,2105.68 4576.74,2145.08 U33.15@4520.47,2145.08
  Bottom w3.94: v1(3421.26,1498.03) 3421.26,1454.72 3431.1,1444.88 4224.41,1444.88 v1(4273.62,1494.09)
PHY1_MDI0+: J3.1 U5.1 U5.10 U33.12 | length 3179.9
  Top w3.94: J3.1@2551.18,547.24 2585.87,512.56 2593.26,512.56 2602.36,521.65 2602.36,598.43 2602.36,620.08 2572.84,649.61 2572.84,687.99 2566.93,693.9 U5.1@2566.93,703.25 U5.10@2566.93,737.69 2566.93,747.04 2572.84,752.95 2572.84,784.76 2770.36,982.28 3138.47,982.28 3401.57,1245.39 3401.57,1416.98 3448.82,1464.23 3448.82,1543.31 v1(3442.91,1549.21) ; v1(4277.56,1643.7) 4283.46,1637.8 4305.79,1637.8 4326.77,1658.77 4326.77,2082.34 4354.08,2109.65 4385.83,2109.65 4389.76,2113.58 U33.12@4415.75,2113.58
  Bottom w3.94: v1(3442.91,1549.21) 3448.82,1555.12 3448.82,1598.43 3488.19,1637.8 4271.65,1637.8 v1(4277.56,1643.7)
PHY1_MDI0-: J3.2 U5.2 U5.9 U33.10 | length 3183.3
  Top w3.94: J3.2@2601.18,447.24 2601.18,479.21 2591.49,488.9 2591.49,498.97 2610.24,517.72 2610.24,600.39 2610.24,624.02 2580.71,653.54 2580.71,687.99 2586.62,693.9 U5.2@2586.62,703.25 U5.9@2586.62,737.69 2586.62,747.04 2580.71,752.95 2580.71,781.5 2773.62,974.41 3141.73,974.41 3409.45,1242.13 3409.45,1413.72 3456.69,1460.97 3456.69,1543.31 v1(3462.6,1549.21) ; v1(4277.56,1624.02) 4283.46,1629.92 4309.06,1629.92 4334.65,1655.51 4334.65,2079.08 4357.34,2101.77 4385.83,2101.77 4389.76,2097.83 U33.10@4415.75,2097.83
  Bottom w3.94: v1(3462.6,1549.21) 3456.69,1555.12 3456.69,1594.49 3492.13,1629.92 4271.65,1629.92 v1(4277.56,1624.02)
PHY1_MDI1+: J3.3 U5.4 U5.7 U33.4 | length 3183.8
  Top w3.94: J3.3@2651.18,547.24 2651.18,503.94 2657.09,498.03 2688.98,498.03 2696.85,505.91 2696.85,592.52 2631.89,657.48 2631.89,683.07 2625.98,688.98 U5.4@2625.98,703.25 U5.7@2625.98,737.69 2625.98,747.04 2631.89,752.95 2631.89,802.47 2784.14,954.72 3152.25,954.72 3425.2,1227.67 3425.2,1381.55 3425.2,1404.84 3476.38,1456.02 3476.38,1580.71 v1(3470.47,1586.61) ; v1(4248.03,1596.46) 4253.94,1602.36 4322.83,1602.36 4364.17,1643.7 4364.17,2049.55 4369.15,2054.53 4385.83,2054.53 4389.76,2050.59 U33.4@4415.75,2050.59
  Bottom w3.94: v1(3470.47,1586.61) 3476.38,1580.71 3476.38,1570.87 3484.25,1562.99 4159.45,1562.99 4198.82,1602.36 4242.13,1602.36 v1(4248.03,1596.46)
PHY1_MDI1-: J3.6 U5.5 U5.6 U33.6 | length 3185.3
  Top w3.94: J3.6@2801.18,447.24 2778.58,469.85 2759.72,469.85 2704.72,524.84 2704.72,596.45 2639.76,661.42 2639.76,687.99 2645.67,693.9 U5.5@2645.67,703.25 U5.6@2645.67,737.69 2645.67,747.04 2639.76,752.95 2639.76,799.21 2787.4,946.85 2929.13,946.85 3155.51,946.85 3433.07,1224.41 3433.07,1401.57 3484.25,1452.76 3484.25,1580.71 v1(3490.16,1586.61) ; v1(4248.03,1616.14) 4253.94,1610.24 4319.57,1610.24 4356.3,1646.96 4356.3,2052.81 4365.89,2062.4 4385.83,2062.4 4389.76,2066.34 U33.6@4415.75,2066.34
  Bottom w3.94: v1(3490.16,1586.61) 3484.25,1580.71 3484.25,1574.8 3488.19,1570.87 4155.51,1570.87 4194.88,1610.24 4242.13,1610.24 v1(4248.03,1616.14)
PHY1_MDI2+: J3.7 U6.1 U6.10 U33.11 | length 3487.5
  Top w3.94: J3.7@2851.18,547.24 2888.58,509.84 2895.67,509.84 2899.61,513.78 2899.61,580.71 2850.4,629.92 2716.54,629.92 2681.11,665.35 2681.11,687.99 2675.2,693.9 U6.1@2675.2,703.25 U6.10@2675.2,737.69 2675.2,747.04 2681.11,752.95 2681.11,793.31 2812.99,925.2 3164.06,925.2 3448.82,1209.95 3448.82,1346.12 3448.82,1393.03 3503.94,1448.14 3503.94,1543.31 v1(3498.03,1549.21) ; v1(4248.03,1541.34) 4253.94,1547.24 4362.2,1547.24 4592.52,1777.56 4592.52,2084.65 4567.52,2109.65 4549.21,2109.65 4545.28,2113.58 U33.11@4520.47,2113.58
  Bottom w3.94: v1(3498.03,1549.21) 3503.94,1543.31 3503.94,1498.03 3515.75,1486.22 4159.45,1486.22 4170.58,1486.22 4231.61,1547.24 4242.13,1547.24 v1(4248.03,1541.34)
PHY1_MDI2-: J3.8 U6.2 U6.9 U33.9 | length 3476.8
  Top w3.94: J3.8@2901.18,447.24 2878.58,469.85 2878.58,494.07 2886.47,501.97 2898.93,501.97 2907.48,510.52 2907.48,583.97 2853.66,637.8 2720.47,637.8 2688.98,669.29 2688.98,687.99 2694.89,693.9 U6.2@2694.89,703.25 U6.9@2694.89,737.69 2694.89,747.04 2688.98,752.95 2688.98,789.37 2816.93,917.32 3167.32,917.32 3456.69,1206.69 3456.69,1389.76 3511.81,1444.88 3511.81,1543.31 v1(3517.72,1549.21) ; v1(4248.03,1561.02) 4253.94,1555.12 4358.94,1555.12 4584.65,1780.82 4584.65,2081.38 4564.26,2101.77 4549.21,2101.77 4545.28,2097.83 U33.9@4520.47,2097.83
  Bottom w3.94: v1(3517.72,1549.21) 3511.81,1543.31 3511.81,1501.97 3519.69,1494.09 4167.32,1494.09 4228.35,1555.12 4242.13,1555.12 v1(4248.03,1561.02)
PHY1_MDI3+: J3.9 U6.4 U6.7 U33.3 | length 3244.9
  Top w3.94: J3.9@2951.18,547.24 2980.71,517.72 2990.5,517.72 3009.84,537.06 3009.84,565.3 2909.79,665.35 2748.37,665.35 2740.16,673.57 2740.16,687.99 2734.25,693.9 U6.4@2734.25,703.25 U6.7@2734.25,737.69 2734.25,747.04 2740.16,752.95 2740.16,785.43 2850.39,895.67 3175.87,895.67 3472.44,1192.24 3472.44,1381.21 3531.5,1440.27 3531.5,1505.91 v1(3525.59,1511.81) ; v1(4277.56,1588.58) 4283.46,1582.68 4345.16,1582.68 4561.02,1798.54 4561.02,2047.92 4554.42,2054.53 4549.21,2054.53 4545.28,2050.59 U33.3@4520.47,2050.59
  Bottom w3.94: v1(3525.59,1511.81) 3531.5,1517.72 3531.5,1527.56 3541.34,1537.4 4167.32,1537.4 4212.6,1582.68 4271.65,1582.68 v1(4277.56,1588.58)
PHY1_MDI3-: J3.10 U6.5 U6.6 U33.5 | length 3282.9
  Top w3.94: J3.10@3001.18,447.24 3001.18,479.21 2991.49,488.9 2991.49,507.58 3017.72,533.8 3017.72,568.56 2913.05,673.23 2751.63,673.23 2748.03,676.83 2748.03,687.99 2753.94,693.9 U6.5@2753.94,703.25 U6.6@2753.94,737.69 2753.94,747.04 2748.03,752.95 2748.03,781.5 2854.33,887.8 3179.13,887.8 3480.31,1188.98 3480.31,1377.95 3539.37,1437.01 3539.37,1505.91 v1(3545.28,1511.81) ; v1(4277.56,1568.9) 4283.46,1574.8 4348.43,1574.8 4568.9,1795.28 4568.9,2051.18 4557.68,2062.4 4549.21,2062.4 4545.28,2066.34 U33.5@4520.47,2066.34
  Bottom w3.94: v1(3545.28,1511.81) 3539.37,1517.72 3539.37,1523.62 3545.28,1529.53 4171.26,1529.53 4216.54,1574.8 4271.65,1574.8 v1(4277.56,1568.9)
PI_NLED_ACTIVITY: R183.2 U33.21 | length 5827.9
  Top w3.94: v1(1116.14,33.46) 1116.14,50.63 1108.27,58.51 1108.27,531.24 1439.23,862.2 2444.94,862.2 2848.43,1265.69 2848.43,2238.19 v1(2858.27,2248.03) ; R183.2@1362.2,35.43 v1(1362.2,55.12) ; U33.21@4520.47,2192.32 4521.06,2190.94 v1(4555.12,2190.94)
  Bottom w3.94: v1(1116.14,33.46) 1340.55,33.46 v1(1362.2,55.12) ; v1(2858.27,2248.03) 2870.08,2236.22 3494.19,2236.22 3673.33,2415.35 4127.28,2415.35 4246.06,2296.57 4246.06,2191.62 4313.67,2124.02 4375,2124.02 4441.93,2190.94 v1(4555.12,2190.94)
PMIC_RESET_KEY: R142.1 U33.100 | length 5174.5
  Top w3.94: R142.1@641.73,1494.09 641.73,1478.35 651.57,1468.5 950.47,1468.5 1072.52,1346.46 2399.61,1346.46 v1(2411.42,1358.27) ; U33.100@4415.75,2806.5 4446.85,2806.5 4450.79,2802.56 4450.79,2781.5 4482.28,2750 4482.28,1881.89 v1(4496.06,1868.11)
  Bottom w3.94: v1(2411.42,1358.27) 2454.72,1401.57 2454.72,1476.38 2799.21,1820.87 4448.82,1820.87 v1(4496.06,1868.11)
PMW0_M0: CON1.13 U33.48 | length 4196.7
  Top w3.94: CON1.13@792.91,1876.38 748.03,1921.26 748.03,2066.93 757.87,2076.77 2127.16,2076.77 2170.47,2120.08 2528.35,2120.08 2566.93,2081.5 v1(2566.93,2043.31) ; v1(4070.87,2163.39) 4049.21,2185.04 4049.21,2259.84 4192.91,2403.54 4377.36,2403.54 4383.86,2397.05 U33.48@4415.75,2397.05
  Bottom w3.94: v1(2566.93,2043.31) 2566.93,2051.18 2627.95,2112.2 3549.39,2112.2 3600.57,2163.39 v1(4070.87,2163.39)
PMW0_M1: CON1.11 R71.1 U33.50 | length 6184
  Top w3.94: CON1.11@692.91,1876.38 738.19,1921.65 738.19,2072.83 750,2084.65 2123.9,2084.65 2167.21,2127.95 2531.61,2127.95 2580.71,2078.86 2580.71,2029.53 v1(2566.93,2015.75) ; v1(4055.12,2141.73) 4041.34,2155.51 4041.34,2263.78 4190.35,2412.8 U33.50@4415.75,2412.8 ; R71.1@4881.89,3143.7 4895.67,3129.92 v1(4895.67,2116.14)
  Bottom w3.94: v1(2566.93,2015.75) 2580.71,2029.53 2580.71,2053.83 2631.21,2104.33 3552.65,2104.33 3603.83,2155.51 4041.34,2155.51 v1(4055.12,2141.73) 4281.5,2141.73 4307.09,2116.14 v1(4895.67,2116.14)
PMW4: CON1.15 U33.46 | length 4208.7
  Top w3.94: CON1.15@892.91,1876.38 850.39,1918.9 850.39,2047.24 872.05,2068.9 2130.42,2068.9 2173.73,2112.2 2525.09,2112.2 2553.15,2084.14 2553.15,2029.53 v1(2539.37,2015.75) ; v1(4106.3,2163.39) 4084.65,2185.04 4066.93,2185.04 4057.09,2194.88 4057.09,2255.91 4194.88,2393.7 4369.49,2393.7 4381.89,2381.3 U33.46@4415.75,2381.3
  Bottom w3.94: v1(2539.37,2015.75) 2553.15,2029.53 2553.15,2065.75 2607.48,2120.08 3546.12,2120.08 3603.21,2177.17 4092.52,2177.17 v1(4106.3,2163.39)
PWM3_IR: CON1.37 U33.24 | length 3215.6
  Top w3.94: CON1.37@1992.91,1876.38 1992.91,1635.83 2057.87,1570.87 2393.99,1570.87 2450.79,1627.66 v1(2450.79,1763.78) ; v1(4267.72,2011.81) 4267.72,2181.1 4294.69,2208.07 U33.24@4415.75,2208.07 4416.34,2208.66 v1(4448.82,2208.66)
  Bottom w3.94: v1(2450.79,1763.78) 2437.01,1777.56 2437.01,1814.34 2601.01,1978.35 3563.67,1978.35 3597.13,2011.81 v1(4267.72,2011.81)
PWM11: CON1.32 U33.31 | length 3833.3
  Top w3.94: CON1.32@1692.91,1976.38 1744.09,1925.2 1744.09,1836.9 2041.62,1539.37 2407.04,1539.37 2505.91,1638.24 v1(2505.91,1763.78) ; v1(4192.91,1956.69) 4192.91,1980.31 4198.82,1986.22 4198.82,2257.87 4234.25,2293.31 4352.36,2293.31 v1(4372.05,2273.62) ; U33.31@4520.47,2271.06 4591.93,2271.06 v1(4594.49,2273.62)
  Bottom w3.94: v1(2505.91,1763.78) 2492.13,1777.56 2492.13,1824.92 2614.06,1946.85 4183.07,1946.85 v1(4192.91,1956.69) ; v1(4372.05,2273.62) 4374.02,2271.65 4592.52,2271.65 v1(4594.49,2273.62)
PWRON_KEY: R143.1 U30.14 U32.1 U33.99 | length 6296.6
  Top w3.94: R143.1@887.8,1505.91 988.19,1505.91 1007.87,1525.59 1007.87,1714.57 1023.62,1730.31 1543.31,1730.31 v1(1551.18,1722.44) ; U30.14@2093.31,2275.98 2128.35,2311.02 2448.26,2311.02 2470.47,2288.81 v1(2470.47,2269.68) ; v1(3944.88,2515.75) 3944.88,2677.17 3972.44,2704.72 4141.79,2704.72 4279.59,2842.52 4462.6,2842.52 4482.28,2822.83 4482.28,2812.4 4488.19,2806.5 U33.99@4520.47,2806.5 4521.06,2807.09 v1(4555.12,2807.09)
  Bottom w3.94: v1(1551.18,1722.44) 1551.18,2301.18 1572.83,2322.83 2046.46,2322.83 U30.14@2093.31,2275.98 ; v1(2470.47,2269.68) 2469.42,2270.74 2476.38,2277.7 2476.38,2280.82 2518.39,2322.83 3479.76,2322.83 3672.67,2515.75 v1(3944.88,2515.75) ; v1(4555.12,2807.09) 4580.71,2781.5 4736.22,2781.5 4771.65,2746.06 5817.72,2746.06 U32.1@5907.87,2836.22
RECOVERY: U30.2 U33.93 | length 3486.1
  Top w3.94: U30.2@1493.31,2275.98 1550,2332.68 1592.52,2332.68 1602.36,2342.52 2461.31,2342.52 2525.59,2278.23 v1(2525.59,2269.68) ; v1(3988.19,2472.44) 3974.41,2486.22 3974.41,2663.39 3992.13,2681.1 4151.57,2681.1 4289.37,2818.9 4448.82,2818.9 4458.66,2809.06 4458.66,2787.4 4486.81,2759.25 U33.93@4520.47,2759.25
  Bottom w3.94: v1(2525.59,2269.68) 2543.31,2287.4 2912.52,2287.4 2916.46,2291.34 3493.01,2291.34 3674.11,2472.44 v1(3988.19,2472.44)
RTC_BATTERY: D43.1 TP8.1 U23.1 | length 821.3
  Top w19.68: v1(442.91,1879.92) 442.91,1842.52 484.25,1801.18 484.25,1631.89 D43.1@468.5,1616.14 ; v1(470.47,2287.4) 470.47,2334.65 496.06,2360.24 U23.1@498.11,2360.24
  Bottom w19.68: v1(442.91,1879.92) 442.91,2259.84 v1(470.47,2287.4) TP8.1@470.47,2316.93
RTCIC_32KOUT: R138.1 U24.7 | length 114.8
  Top w15.75: R138.1@555.12,1568.9 555.23,1569.01 572.95,1569.01 612.32,1608.38 U24.7@653.53,1608.38
RUN_PG: R172.2 U32.3 U33.92 | length 3989.9
  Top w3.94: R172.2@2216.54,2267.72 2228.35,2279.53 2405.51,2279.53 v1(2415.35,2269.68) ; v1(4003.94,2551.18) 4003.94,2633.86 4027.56,2657.48 4161.42,2657.48 4247.44,2743.5 U33.92@4415.75,2743.5 4416.34,2744.09 v1(4448.82,2744.09)
  Bottom w3.94: v1(2415.35,2269.68) 2496.06,2350.39 3473.91,2350.39 3674.7,2551.18 v1(4003.94,2551.18) ; v1(4448.82,2744.09) 4740.22,2744.09 4761.87,2722.44 5821.65,2722.44 U32.3@5907.87,2636.22
SARADC_IN3: J24.14 R153.1 | length 2356.5
  Top w3.94: J24.14@4091.93,3320.08 4091.93,3354.33 4103.74,3366.14 4285.43,3366.14 4305.12,3346.46 4305.12,2929.13 4159.45,2783.46 v1(4159.45,2771.65) ; v1(4293.31,2856.3) 4496.06,2856.3 v1(4515.75,2836.61) ; v1(4807.09,2767.72) 4846.46,2767.72 4868.11,2746.06 v1(4868.11,2586.61) ; v1(5297.24,2460.63) R153.1@5312.99,2460.63
  Bottom w3.94: v1(4159.45,2771.65) 4234.25,2771.65 4293.31,2830.71 v1(4293.31,2856.3) ; v1(4515.75,2836.61) 4553.15,2836.61 4596.46,2793.31 4757.87,2793.31 4783.46,2767.72 v1(4807.09,2767.72) ; v1(4868.11,2586.61) 4950.79,2503.94 5253.94,2503.94 v1(5297.24,2460.63)
SARADC_VIN2_HP_HOOK: C35.1 J24.30 R32.1 R33.2 | length 4177.7
  Top w3.94: J24.30@3965.94,3320.08 3966.54,3319.49 v1(3966.54,3289.37) ; v1(4275.59,3257.87) 4275.59,2934.31 4105.06,2763.78 3976.38,2763.78 3907.48,2694.88 3907.48,2529.53 3858.27,2480.31 3858.27,1812.99 4070.87,1600.39 4070.87,1204.72 4383.86,891.73 4383.86,527.56 4431.1,480.31 4431.1,226.38 4397.64,192.91 4397.64,110.24 4401.57,106.3 4429.13,106.3 R33.2@4448.82,86.61 ; C35.1@4448.82,47.24 R33.2@4448.82,86.61 ; R32.1@4486.22,86.61 R33.2@4448.82,86.61
  Bottom w3.94: v1(3966.54,3289.37) 3966.54,3312.99 3974.41,3320.87 4212.6,3320.87 v1(4275.59,3257.87)
SATA1_RXN: C33.1 U8.11 | length 203.4
  Top w3.94: U8.11@5461.02,1025.2 5461.42,1025.59 v1(5480.31,1025.59) ; v1(5547.24,1045.28) C33.1@5564.96,1045.28
  Bottom w3.94: v1(5480.31,1025.59) 5486.22,1031.5 5501.97,1031.5 5533.46,1062.99 5562.99,1062.99 5570.87,1055.12 5570.87,1037.4 5562.99,1029.53 5553.15,1029.53 5547.24,1035.43 v1(5547.24,1045.28)
SATA1_RXP: C34.1 U8.12 | length 230.2
  Top w3.94: U8.12@5461.02,1044.88 5461.42,1045.28 v1(5480.31,1045.28) ; v1(5547.24,1005.91) C34.1@5564.96,1005.91
  Bottom w3.94: v1(5480.31,1045.28) 5486.22,1039.37 5498.03,1039.37 5529.53,1070.87 5566.93,1070.87 5578.74,1059.06 5578.74,1033.46 5566.93,1021.65 5553.15,1021.65 5547.24,1015.75 v1(5547.24,1005.91)
SATA1_TXN: C32.1 U8.13 | length 200.8
  Top w3.94: U8.13@5461.02,1064.57 5461.42,1064.96 5476.38,1064.96 5482.28,1070.87 5515.75,1070.87 5531.5,1086.61 5531.5,1165.35 5537.4,1171.26 5549.21,1171.26 C32.1@5564.96,1155.51
SATA1_TXP: C31.1 U8.14 | length 200.8
  Top w3.94: U8.14@5461.02,1084.25 5461.42,1084.65 5476.38,1084.65 5482.28,1078.74 5511.81,1078.74 5523.62,1090.55 5523.62,1169.29 5533.46,1179.13 5549.21,1179.13 C31.1@5564.96,1194.88
SATA2_RXN: C113.1 U22.11 | length 477.8
  Top w3.94: U22.11@5461.02,720.08 5476.38,720.08 5482.28,725.98 5502.64,725.98 5517.72,710.91 5517.72,566.93 v1(5511.81,561.02) ; v1(5480.31,387.8) C113.1@5496.06,387.8
  Bottom w3.94: v1(5480.31,387.8) 5480.31,375.98 5488.19,368.11 5511.81,368.11 5517.72,374.02 5517.72,555.12 v1(5511.81,561.02)
SATA2_RXP: C114.1 U22.12 | length 506.6
  Top w3.94: U22.12@5461.02,739.76 5476.38,739.76 5482.28,733.86 5505.91,733.86 5525.59,714.17 5525.59,566.93 v1(5531.5,561.02) ; v1(5480.31,340.55) C114.1@5496.06,340.55
  Bottom w3.94: v1(5480.31,340.55) 5480.31,356.3 5484.25,360.24 5515.75,360.24 5525.59,370.08 5525.59,555.12 v1(5531.5,561.02)
SATA2_TXN: C112.1 U22.13 | length 512.8
  Top w3.94: U22.13@5461.02,759.45 5476.38,759.45 5482.28,765.35 5508.55,765.35 5559.06,714.85 5559.06,534.76 5540.05,515.75 5476.38,515.75 5454.72,494.09 5454.72,456.69 5462.6,448.82 5476.38,448.82 C112.1@5496.06,429.13
SATA2_TXP: C110.1 U22.14 | length 511.3
  Top w3.94: U22.14@5461.02,779.13 5476.38,779.13 5482.28,773.23 5511.81,773.23 5566.93,718.11 5566.93,531.5 5543.31,507.87 5479.64,507.87 5462.6,490.83 5462.6,462.6 5468.5,456.69 5476.38,456.69 C110.1@5496.06,476.38
SDMMC0_CLK: R11.1 U33.57 | length 2339.5
  Top w3.94: U33.57@4520.47,2475.79 4521.06,2476.38 v1(4580.71,2476.38) ; R11.1@4797.24,633.86 4787.4,643.7 4718.5,643.7 4647.64,714.57 4647.64,1147.64 4647.64,1164 4836.61,1352.98 v1(4836.61,2476.38)
  Bottom w3.94: v1(4580.71,2476.38) v1(4836.61,2476.38)
SDMMC0_CMD: CN14A1.3 ED13.1 U33.62 | length 2727.4
  Top w3.94: U33.62@4415.75,2507.28 4416.34,2507.87 v1(4446.85,2507.87) ; v1(4744.09,511.81) 4744.09,532.09 4759.84,532.09 4769.69,541.93 4769.69,608.27 4757.87,620.08 4716.54,620.08 4631.89,704.72 4631.89,1155.51 4631.89,1170.53 4812.99,1351.63 4812.99,2498.03 4818.9,2503.94 v1(4832.68,2503.94)
  Bottom w3.94: v1(4446.85,2507.87) 4828.74,2507.87 v1(4832.68,2503.94) ; CN14A1.3@4724.41,395.89 4726.38,397.86 4726.38,494.09 v1(4744.09,511.81)
SDMMC0_D0: CN14A1.7 ED11.1 U33.63 | length 2756
  Top w3.94: U33.63@4520.47,2523.03 4521.06,2523.62 v1(4580.71,2523.62) ; v1(4846.46,2523.62) 4858.27,2511.81 4858.27,1352.36 4663.39,1157.48 4663.39,724.41 4724.41,663.39 4846.46,663.39 4877.95,631.89 4877.95,537.99 4870.08,530.12 4852.36,530.12 v1(4852.36,509.84)
  Bottom w3.94: v1(4580.71,2523.62) 4600.39,2543.31 4826.77,2543.31 v1(4846.46,2523.62) ; v1(4852.36,509.84) 4852.36,478.35 4897.64,433.07 CN14A1.7@4897.64,395.89
SDMMC0_D1: CN14A1.8 ED10.1 U33.67 | length 2797.5
  Top w3.94: U33.67@4520.47,2554.53 4578.15,2554.53 v1(4578.74,2555.12) ; v1(4846.46,2555.12) 4866.14,2535.43 4866.14,1348.43 4671.26,1153.54 4671.26,728.35 4728.35,671.26 4865.55,671.26 4928.54,608.27 4928.54,537.4 4921.26,530.12 4903.54,530.12 v1(4903.54,509.84)
  Bottom w3.94: v1(4578.74,2555.12) v1(4846.46,2555.12) ; v1(4903.54,509.84) 4903.54,482.28 4940.94,444.88 CN14A1.8@4940.94,395.89
SDMMC0_D2/ARMJTAG_TCK: CN14A1.1 ED15.1 U33.69 | length 2579.3
  Top w3.94: U33.69@4520.47,2570.28 4521.06,2568.9 v1(4608.27,2568.9) ; v1(4641.73,513.78) 4641.73,532.09 4657.48,532.09 4667.03,541.63 4667.03,642.03 4616.14,692.91 4616.14,1163.39 4616.14,1177.05 4797.24,1358.15 4797.24,2561.02 v1(4805.12,2568.9)
  Bottom w3.94: v1(4608.27,2568.9) v1(4805.12,2568.9) ; CN14A1.1@4637.8,395.89 4637.79,509.84 v1(4641.73,513.78)
SDMMC0_D3/ARMJTAG_TMS: CN14A1.2 ED14.1 U33.61 | length 2570.3
  Top w3.94: U33.61@4520.47,2507.28 4591.93,2507.28 v1(4608.27,2523.62) ; v1(4692.91,511.81) 4692.91,532.09 4710.63,532.09 4718.5,539.96 4718.5,604.33 4624.02,698.82 4624.02,1159.45 4624.02,1173.79 4805.12,1354.89 4805.12,2515.75 v1(4812.99,2523.62)
  Bottom w3.94: v1(4608.27,2523.62) v1(4812.99,2523.62) ; CN14A1.2@4681.1,395.89 4681.1,500 v1(4692.91,511.81)
SDMMC0_DET_L: CN14A1.9 ED9.1 U33.76 | length 2973.3
  Top w3.94: U33.76@4415.75,2617.52 4416.34,2618.11 v1(4446.85,2618.11) ; v1(4805.12,2596.46) 4824.8,2596.46 4874.02,2547.24 4874.02,1344.49 4679.13,1149.61 4679.13,734.25 4734.25,679.13 4899.02,679.13 4979.72,598.43 4979.72,541.34 4968.5,530.12 4954.72,530.12 v1(4954.72,509.84)
  Bottom w3.94: v1(4446.85,2618.11) 4468.5,2596.46 v1(4805.12,2596.46) ; v1(4954.72,509.84) 4954.72,468.5 4986.22,437.01 4986.22,397.86 CN14A1.9@4984.25,395.89
SDMMC_PWREN: R13.2 U33.75 | length 4410.9
  Top w3.94: U33.75@4520.47,2617.52 4565.55,2617.52 4578.74,2604.33 v1(4578.74,2582.68) ; v1(4911.42,2509.84) 4911.42,1311.02 v1(4925.2,1297.24) ; R13.2@5165.35,374.02 5188.98,374.02 5194.88,379.92 v1(5194.88,584.65) ; v1(5338.58,1322.83) 5352.36,1336.61 5352.36,1372.05 5362.2,1381.89 5698.82,1381.89 5726.38,1409.45 5877.95,1409.45 5903.54,1383.86 5903.54,694.88 5637.8,694.88 v1(5627.95,704.72)
  Bottom w3.94: v1(4578.74,2582.68) 4838.58,2582.68 v1(4911.42,2509.84) ; v1(4925.2,1297.24) 5312.99,1297.24 v1(5338.58,1322.83) ; v1(5194.88,584.65) 5206.69,596.46 5466.54,596.46 5543.31,673.23 5596.46,673.23 v1(5627.95,704.72)
SPI0_CSO_MO: CON1.33 U33.28 | length 3450.6
  Top w3.94: CON1.33@1792.91,1876.38 1792.91,1799.21 2044.88,1547.24 2403.78,1547.24 2492.13,1635.59 2492.13,1777.56 v1(2478.35,1791.34) ; v1(4303.15,1970.47) 4259.84,1970.47 4246.06,1984.25 4246.06,2183.07 4287.4,2224.41 4372.64,2224.41 4387.8,2239.57 U33.28@4415.75,2239.57
  Bottom w3.94: v1(2478.35,1791.34) 2478.35,1822.27 2610.8,1954.72 3576.77,1954.72 3592.52,1970.47 v1(4303.15,1970.47)
SPI0_MISO_MO: CON1.31 U33.30 | length 3446
  Top w3.94: CON1.31@1692.91,1876.38 2037.8,1531.5 2410.3,1531.5 2519.69,1640.88 2519.69,1777.56 v1(2505.91,1791.34) ; v1(4250,1956.69) 4238.19,1968.5 4238.19,2187.01 4283.46,2232.28 4352.36,2232.28 4375.39,2255.31 U33.30@4415.75,2255.31
  Bottom w3.94: v1(2505.91,1791.34) 2505.91,1827.56 2617.32,1938.98 4232.28,1938.98 v1(4250,1956.69)
SPI3_CLK_M0: CON1.23 U33.38 | length 3929.4
  Top w3.94: CON1.23@1292.91,1876.38 1342.52,1826.77 1717.71,1826.77 2028.74,1515.75 2416.82,1515.75 2547.24,1646.17 v1(2547.24,1763.78) ; v1(4149.61,1917.32) 4161.42,1929.13 4161.42,2279.53 4202.76,2320.87 4383.27,2320.87 4385.83,2318.31 U33.38@4415.75,2318.31
  Bottom w3.94: v1(2547.24,1763.78) 2547.24,1846.63 2617.94,1917.32 v1(4149.61,1917.32)
SPI3_CSO_M0: CON1.24 U33.39 | length 3543.9
  Top w3.94: CON1.24@1292.91,1976.38 1292.91,2021.65 1300.79,2029.53 2147.64,2029.53 2190.94,2072.83 2473.79,2072.83 2484.25,2062.37 v1(2484.25,2043.31) ; v1(4106.3,2234.25) 4106.3,2257.87 4198.82,2350.39 v1(4307.09,2350.39) ; U33.39@4520.47,2334.06 4521.06,2334.65 v1(4557.09,2334.65)
  Bottom w3.94: v1(2484.25,2043.31) 2484.25,2052.53 2591.17,2159.45 3529.53,2159.45 3604.33,2234.25 v1(4106.3,2234.25) ; v1(4307.09,2350.39) 4322.83,2334.65 v1(4557.09,2334.65)
SPI3_MISO_M0: CON1.21 R79.2 U33.40 | length 4906.7
  Top w3.94: R79.2@224.41,1549.21 242.13,1531.5 346.46,1531.5 352.36,1537.4 v1(352.36,1667.32) ; v1(584.65,1667.32) 584.65,1687.01 732.28,1834.65 1151.18,1834.65 CON1.21@1192.91,1876.38 1145.67,1923.62 1145.67,2021.65 1161.42,2037.4 2143.47,2037.4 2186.78,2080.71 2477.05,2080.71 2498.03,2059.73 2498.03,2029.53 v1(2484.25,2015.75) ; v1(4131.89,2234.25) 4131.89,2271.65 4194.29,2334.06 U33.40@4415.75,2334.06
  Bottom w3.94: v1(352.36,1667.32) v1(584.65,1667.32) ; v1(2484.25,2015.75) 2498.03,2029.53 2498.03,2055.18 2594.43,2151.57 3533.08,2151.57 3601.98,2220.47 4118.11,2220.47 v1(4131.89,2234.25)
SPI3_MOSI_M0: CON1.19 U33.44 | length 3690.8
  Top w3.94: CON1.19@1092.91,1876.38 1133.86,1917.32 1133.86,2029.53 1149.61,2045.28 2140.21,2045.28 2183.51,2088.58 2480.31,2088.58 2511.81,2057.09 v1(2511.81,2043.31) ; v1(4070.87,2206.69) 4070.87,2257.87 4076.77,2263.78 4076.77,2264.4 4196.23,2383.86 4363.58,2383.86 4381.89,2365.55 U33.44@4415.75,2365.55
  Bottom w3.94: v1(2511.81,2043.31) 2511.81,2057.82 2597.69,2143.7 3536.34,2143.7 3599.33,2206.69 v1(4070.87,2206.69)
SPKN_OUT: J9.2 J24.58 | length 3467.8
  Top w7.87: J24.58@3745.47,3320.08 3746.06,3319.49 v1(3746.06,3289.37)
  Top w15.75: J9.2@1211.02,2492.13 1251.97,2451.18 1251.97,2401.57 1291.34,2362.2 1574.8,2362.2 1584.65,2372.05 v1(2614.17,2372.05) ; v1(3744.09,2592.52) 3746.06,2592.52 v1(3746.06,3049.21)
  Bottom w15.75: v1(2614.17,2372.05) 3460.63,2372.05 3661.42,2572.83 3734.25,2572.83 3744.09,2582.68 v1(3744.09,2592.52) ; v1(3746.06,3049.21) 3726.38,3068.9 3726.38,3277.56 3738.19,3289.37 v1(3746.06,3289.37)
SPKP_OUT: J9.1 J24.60 | length 3393.9
  Top w7.87: J24.60@3729.72,3320.08 3729.72,3279.53 3730.31,3279.53 v1(3746.06,3263.78)
  Top w15.75: J9.1@1311.02,2492.13 1271.65,2452.76 1271.65,2409.73 1299.49,2381.89 1564.96,2381.89 1574.8,2391.73 v1(2614.17,2391.73) ; v1(3724.41,2592.52) 3724.41,3057.09 v1(3746.06,3078.74)
  Bottom w15.75: v1(2614.17,2391.73) 3448.82,2391.73 3649.61,2592.52 v1(3724.41,2592.52) ; v1(3746.06,3078.74) v1(3746.06,3263.78)
SYNC_IN: U30.8 U33.16 | length 3116.6
  Top w3.94: U30.8@1793.31,2275.98 1831.1,2238.19 2125.98,2238.19 2135.83,2248.03 2135.83,2297.24 2141.73,2303.15 2445,2303.15 2456.69,2291.45 2456.69,2255.91 v1(2442.91,2242.13) ; v1(4330.71,2145.67) 4415.16,2145.67 U33.16@4415.75,2145.08
  Bottom w3.94: v1(2442.91,2242.13) 2456.69,2255.91 2456.69,2275.39 2512.01,2330.71 3476.49,2330.71 3675.31,2529.53 4035.38,2529.53 4261.81,2303.09 4261.81,2201.66 4317.8,2145.67 v1(4330.71,2145.67)
SYNC_OUT: U30.9 U33.18 | length 2974.4
  Top w3.94: U30.9@1893.31,2175.98 1893.31,2220.47 1903.15,2230.31 2131.89,2230.31 2143.7,2242.13 2143.7,2287.4 2151.57,2295.28 2425.2,2295.28 2442.91,2277.56 v1(2442.91,2269.68) ; v1(4385.83,2161.42) 4415.16,2161.42 U33.18@4415.75,2160.83
  Bottom w3.94: v1(2442.91,2269.68) 2442.91,2283.46 2500,2340.55 3475.2,2340.55 3672.05,2537.4 4039.37,2537.4 4269.69,2307.09 4269.69,2204.92 4297.44,2177.17 4370.08,2177.17 v1(4385.83,2161.42)
TP_DET_1: J24.81 R66.1 | length 2554.3
  Top w3.94: R66.1@1354.33,3230.31 v1(1370.08,3230.31) ; v1(2998.03,3309.06) 2976.38,3287.4 2976.38,3208.66 3070.87,3114.17 3289.37,3114.17 v1(3307.09,3096.46) ; v1(3541.34,3157.48) 3556.5,3172.64 J24.81@3556.5,3216.14
  Bottom w3.94: v1(1370.08,3230.31) 1370.08,3283.46 1438.98,3352.36 2954.72,3352.36 v1(2998.03,3309.06) ; v1(3307.09,3096.46) 3368.11,3157.48 v1(3541.34,3157.48)